# Altium PCB PCB1.PcbDoc
Units mil, origin at the board's own origin, x right, y up, seen from the top; angles counter-clockwise.
Board outline 2440.03 x 1680.03 mil, 2 copper layers (Top Layer, Bottom Layer); 23 components, 15 nets, 65 pads, 0 vias.
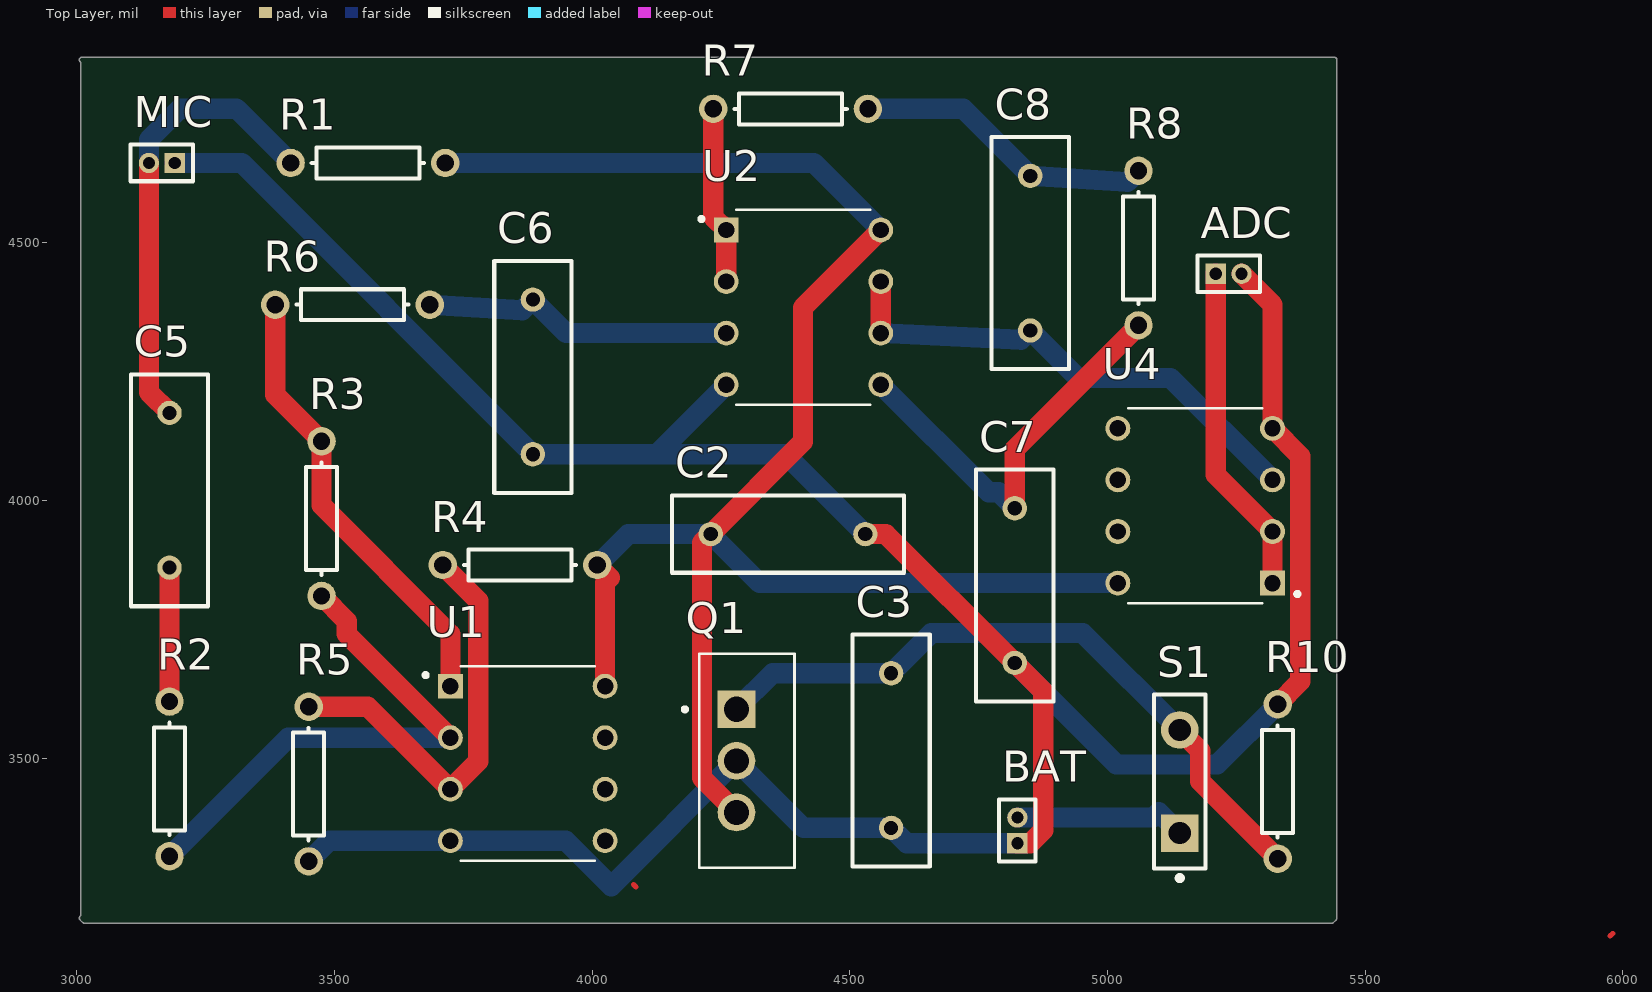
[diagram p0: Top Layer view]
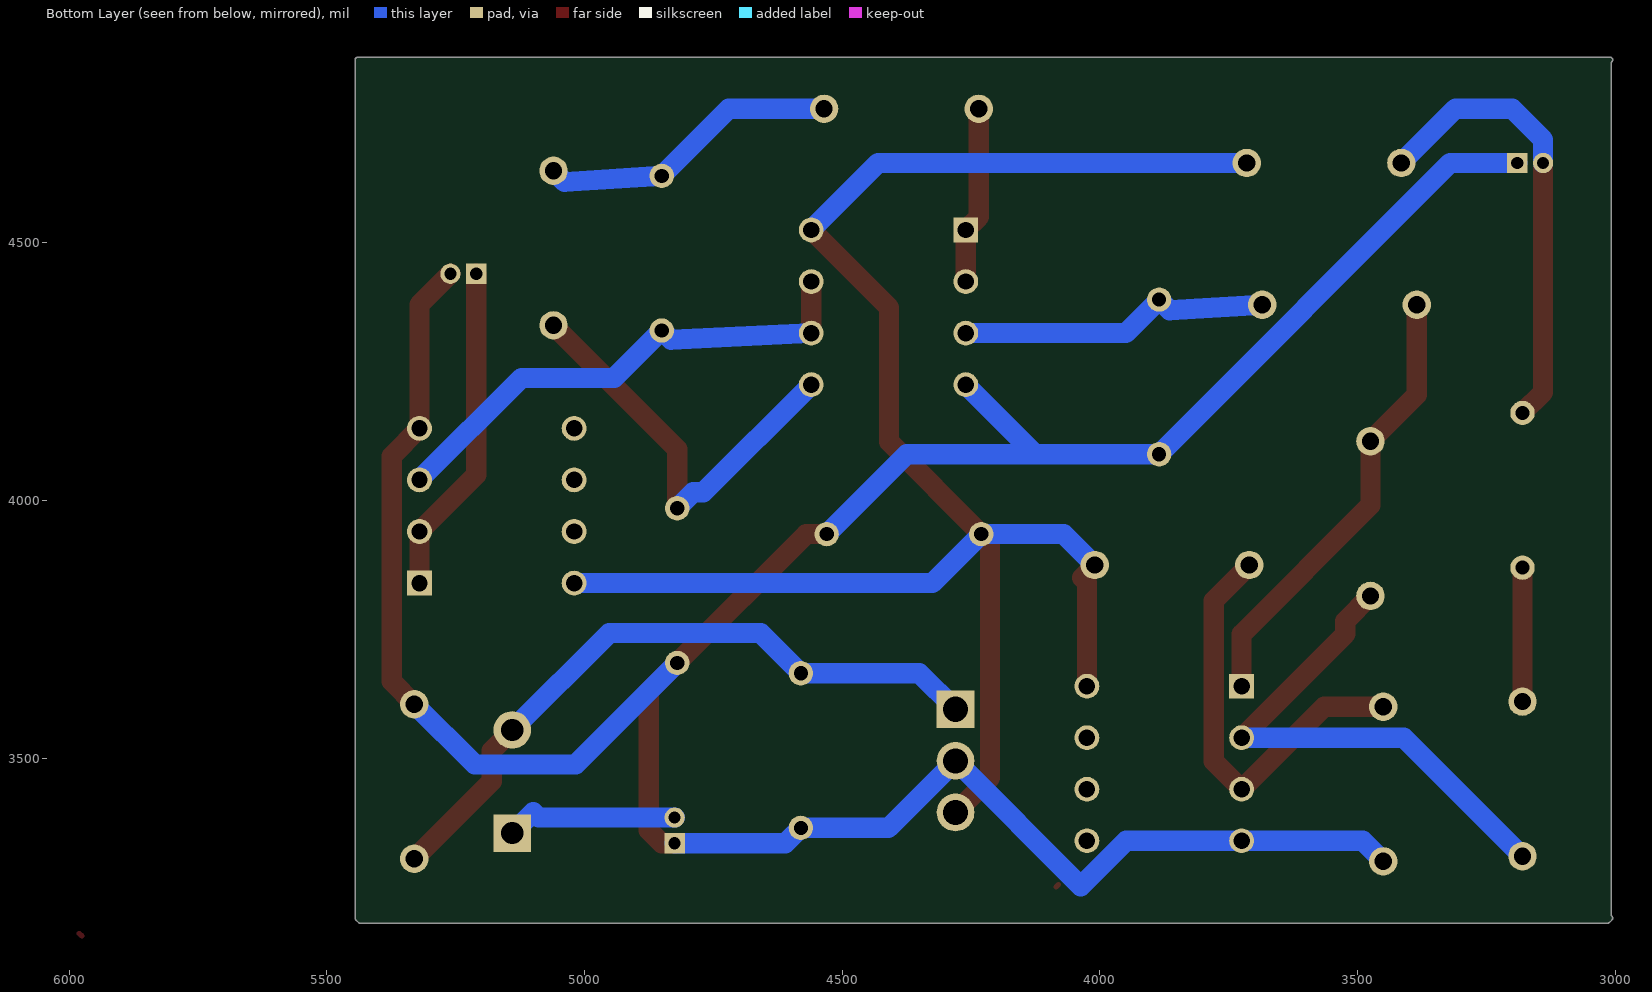
[diagram p1: Bottom Layer view, seen from below]

## Layer stack, top to bottom
Top Solder: solder mask 0.4, Solder Resist, Dk 3.5
Top Layer: signal copper 1.4
Dielectric 1: dielectric 12.6, FR-4, Dk 4.8
Bottom Layer: signal copper 1.4
Bottom Solder: solder mask 0.4, Solder Resist, Dk 3.5

## Board outline
3006.45,3186.45 cw(c3010,3190) 3007.49,3194.34 3007.49,4850.66 cw(c3010,4855) 3010,4860.02 5440,4860.02 cw(c5440,4855) 5445.02,4855 5445.02,3190 cw(c5440,3190) 5443.53,3186.44 5438.55,3181.45 cw(c5435.01,3184.97) 5435,3179.99 3015,3179.99 cw(c3015,3185) 3011.44,3181.47

## Design rules (kind name [scope] priority, off if disabled: settings)
Clearance [All] p1: gap=10 ignorepadtopadclearanceinfootprint=FALSE except(0: Arc-Hole Track-Hole SMDPad-Hole THPad-Hole Via-Hole Fill-Hole Poly-Hole Region-Hole Text-Hole)
PolygonConnect [All] p1: connectstyle=Relief reliefconductorwidth=10 reliefentries=4 polygonreliefangle="90 Angle" airgapwidth=10
RoutingVias [All] p1: holewidth=28 width=50 viastyle="Through Hole" minholewidth=28 minwidth=50 maxholewidth=28 maxwidth=50
SolderMaskExpansion [All] p1: expansion=4 istentingtop=FALSE
Width [All] p1: maxlimit=39.37 minlimit=39.37 preferedwidth=39.37 minimp=50.000000 maximp=50.000000 favimp=50.000000
30 further rules are at their usual default settings.

## Components (designator, comment, footprint, x,y, rotation, side; value= is the part's Value field where it differs from the comment)
ADC "MHDR1X2" MHDR1X2 5210,4440 r0 top
BAT "MHDR1X2" MHDR1X2 4825,3335 r90 top
C2 "Cap" RAD-0.3 4380,3935 r180 top value=0.1uF
C3 "Cap" RAD-0.3 4580,3515 r90 top value=0.22uF
C5 "Cap" RAD-0.3 3180,4020 r90 top value=1uF
C6 "Cap" RAD-0.3 3885,4240 r270 top value=10nF
C7 "Cap" RAD-0.3 4820,3835 r270 top value=10nF
C8 "Cap" RAD-0.3 4850,4480 r90 top value=100nF
MIC "MHDR1X2" MHDR1X2 3190,4655 r180 top
Q1 "LM7805CT/NOPB" TO254P1054X470X1955-3 4280,3495 r270 top
R1 "Res1" AXIAL-0.3 3565,4655 r0 top value=2.2K
R2 "Res1" AXIAL-0.3 3180,3460 r270 top value=3.3K
R3 "Res1" AXIAL-0.3 3475,3965 r90 top value=3.3M
R4 "Res1" AXIAL-0.3 3860,3875 r0 top value=10K
R5 "Res1" AXIAL-0.3 3450,3450 r90 top value=10K
R6 "Res1" AXIAL-0.3 3535,4380 r0 top value=47K
R7 "Res1" AXIAL-0.3 4385,4760 r0 top value=5K
R8 "Res1" AXIAL-0.3 5060,4490 r270 top value=39K
R10 "Res1" AXIAL-0.3 5330,3455 r270 top value=10K
S1 "SW-SPST" SPST-2 5140,3455 r90 top
U1 "LM358N" DIP762W46P254L960H508Q8 3875,3490 r0 top
U2 "LM358N" DIP762W46P254L960H508Q8 4410,4375 r0 top
U4 "LM358N" DIP762W46P254L960H508Q8 5170,3990 r180 top

## Footprints (in the part's own frame and the unit in brackets; to place one, negate y for a bottom-side part, rotate by r counter-clockwise, add the part's x,y. Pads: shape width x height; smd on the part's side, far side on the other; paste and mask are expansions set on the pad)
AXIAL-0.3 [mm] "Axial Device, Thru-Hole; 2 Leads; 0.3 in Pin Spacing"
  round 1.4 hole 0.85: 1(-3.81,0) 2(3.81,0)
  silkscreen extent -2.77,-0.76 2.77,0.76
DIP762W46P254L960H508Q8 [mm]
  rect 1.22x1.22 / inner round 1.22 / far side rect 1.22x1.22 hole 0.81: 1(-3.81,3.81)
  round 1.22 hole 0.81: 2(-3.81,1.27) 3(-3.81,-1.27) 4(-3.81,-3.81) 5(3.81,-3.81) 6(3.81,-1.27) 7(3.81,1.27) 8(3.81,3.81)
  silkscreen extent -5.13,-4.8 3.3,4.8, body extent -4.79,-5.46 4.79,5.46, height 5.33
MHDR1X2 [mm] "Connector; Header; 2 Position"
  rect 1x1 hole 0.6: 1(0,0)
  round 1 hole 0.6: 2(1.27,0)
  silkscreen extent -0.9,-0.9 2.17,0.9
RAD-0.3 [mm] "Radial Cap, Thru-Hole; 2 Leads; 0.3 in Pin Spacing"
  round 1.2 hole 0.7: 1(-3.81,0) 2(3.81,0)
  silkscreen extent -5.71,-1.91 5.71,1.91
SPST-2 [mm] "Switch; 2 Leads"
  rect 1.85x1.85 hole 1.1: 1(-2.54,0)
  round 1.85 hole 1.1: 2(2.54,0)
  silkscreen extent -4.89,-1.27 4.28,1.27
TO254P1054X470X1955-3 [mm]
  rect 1.86x1.86 hole 1.24: 1(-2.54,0)
  round 1.86 hole 1.24: 2(0,0) 3(2.54,0)
  silkscreen extent -5.27,-2.64 5.27,2.86

## Part data
ADC BAT MIC: "Header, 2-Pin", LatestRevisionDate=17-Jul-2002, LatestRevisionNote="Re-released for DXP Platform.", Publisher="Altium Limited"
C2 C3 C5 C6 C7 C8: "Capacitor", LatestRevisionDate=17-Jul-2002, LatestRevisionNote="Re-released for DXP Platform.", PackageDescription="Radial Cap, Thru-Hole; 2 Leads; 0.3 in Pin Spacing", PackageReference=RAD-0.3, Published=8-Jun-2000, Publisher="Altium Limited"
Q1: Package=None, Availability=Unavailable, MP=LM7805CT/NOPB, Price=None
R1 R2 R3 R4 R5 R6 R7 R8 R10: "Resistor", LatestRevisionDate=17-Jul-2002, LatestRevisionNote="Re-released for DXP Platform.", PackageDescription="Axial Device, Thru-Hole; 2 Leads; 0.3 in Pin Spacing", PackageReference=AXIAL-0.3, Published=8-Jun-2000, Publisher="Altium Limited"
S1: "Single-Pole, Single-Throw Switch", LatestRevisionDate=17-Jul-2002, LatestRevisionNote="Re-released for DXP Platform.", PackageDescription="Switch; 2 Leads", PackageReference=SPST-2, Published=24-Mar-1999, Publisher="Altium Limited"
U1 U2 U4: "General Purpose Amplifier 2 Circuit - 8-PDIP", Package=None, Check_prices=https://www.snapeda.com/parts/LM358N/Onsemi/view-part/?ref=eda, MF=onsemi, MP=LM358N, SnapEDA_Link=https://www.snapeda.com/parts/LM358N/Onsemi/view-part/?ref=snap

## Nets (pads, with @x,y where several pads share a name; then routed paths per layer and width w, separated by ;. In a path a pad name is that pad's centre, name@x,y a point inside that pad or via, vN(x,y) a via of type N, cw(c..) or ccw(c..) an arc to the next point about the centre after c; other vN are vias at no path point)
GND: ADC.2 BAT.1 C2.1 C3.1 C6.2 C7.2 MIC.1 Q1.2 R5.1 R10.1 U1.4 U2.4 U4.4 | length 5766.3
  Top Layer w39.37: C2.1 4570,3935 C7.2 4875,3630 4875,3360 4850,3335 BAT.1 ; ADC.2 5320,4380 U4.4 5374,4086 5374,3649 R10.1
  Bottom Layer w39.37: MIC.1 3320,4655 C6.2 4125,4090 ; R5.1 3490,3340 U1.4 3949,3340 4037,3252 Q1.2 4410,3365 C3.1 4610,3335 BAT.1 ; U2.4 4125,4090 ; C2.1 4375,4090 4125,4090 ; C7.2 5017,3488 5213,3488 R10.1
NetADC_1: ADC.1 U4.1 U4.2 | length 645.6
  Top Layer w39.37: ADC.1 5210,4050 U4.2 U4.1
NetBAT_2: BAT.2 S1.1 | length 336.1
  Bottom Layer w39.37: BAT.2 5089,3385 5099.5,3395.5 S1.1
NetC3_2: C3.2 Q1.1 R10.2 S1.2 | length 1327.9
  Top Layer w39.37: S1.2 5180,3515 5180,3455 R10.2
  Bottom Layer w39.37: Q1.1 4350,3665 C3.2 4658,3743 4952,3743 S1.2
NetC5_1: C5.1 R2.1 | length 260
  Top Layer w39.37: R2.1 C5.1
NetC5_2: C5.2 MIC.2 R1.1 | length 889.9
  Top Layer w39.37: MIC.2 3140,4210 C5.2
  Bottom Layer w39.37: MIC.2 3140,4700 3200,4760 3310,4760 R1.1
NetC6_1: C6.1 R6.2 U2.3 | length 610.7
  Bottom Layer w39.37: R6.2 3864.5,4369.5 C6.1 3950,4325 U2.3
NetC7_1: C7.1 R8.2 U2.5 | length 813.8
  Top Layer w39.37: C7.1 4820,4100 R8.2
  Bottom Layer w39.37: U2.5 4769,4016 4789,4016 C7.1
NetC8_1: C8.1 U2.6 U2.7 U4.3 | length 987.9
  Top Layer w39.37: U2.6 U2.7
  Bottom Layer w39.37: U2.6 4832,4312 C8.1 4942,4238 5122,4238 U4.3
NetC8_2: C8.2 R7.2 R8.1 | length 588.3
  Bottom Layer w39.37: R7.2 4720,4760 C8.2 5038,4618 R8.1
NetR2_2: R2.2 R3.1 U1.2 | length 1018.8
  Top Layer w39.37: R3.1 3524,3766 3524,3741 U1.2
  Bottom Layer w39.37: R2.2 3410,3540 U1.2
NetR4_1: R4.1 R5.2 U1.3 | length 827.2
  Top Layer w39.37: R5.2 3565,3600 U1.3 3779,3494 3779,3806 R4.1
NetR7_1: R7.1 U2.1 U2.2 | length 345.4
  Top Layer w39.37: R7.1 4235,4550 U2.1 U2.2
PREAMP: R3.2 R6.1 U1.1 | length 880.8
  Top Layer w39.37: R6.1 3385,4205 R3.2 3475,3991 3725,3741 U1.1
VCC: C2.2 Q1.3 R1.2 R4.2 U1.8 U2.8 U4.8 | length 3523.6
  Top Layer w39.37: R4.2 4034.5,3850.5 4025,3841 U1.8 ; Q1.3 4213,3462 4213,3918 C2.2 4409,4114 4409,4374 U2.8
  Bottom Layer w39.37: R1.2 4430,4655 U2.8 ; R4.2 4070,3935 C2.2 4325,3840 U4.8
pads on no net: U1.5 U1.6 U1.7 U4.5 U4.6 U4.7
copper on no net: | length 14.1
  Top Layer w10: 4080,3255 4085,3250 ; 5975,3155 5980,3160